# Altium PCB mppt.PcbDoc (part 6 of 6)
Units mm, origin at the board's own origin, x right, y up, seen from the top; angles counter-clockwise.
Board outline 161 x 166 mm, 6 copper layers (Top Layer, Layer 1, Layer 2, Layer 3, Layer 4, Bottom Layer), stack 0.815 mm thick; 460 components, 230 nets, 1421 pads, 2551 vias.
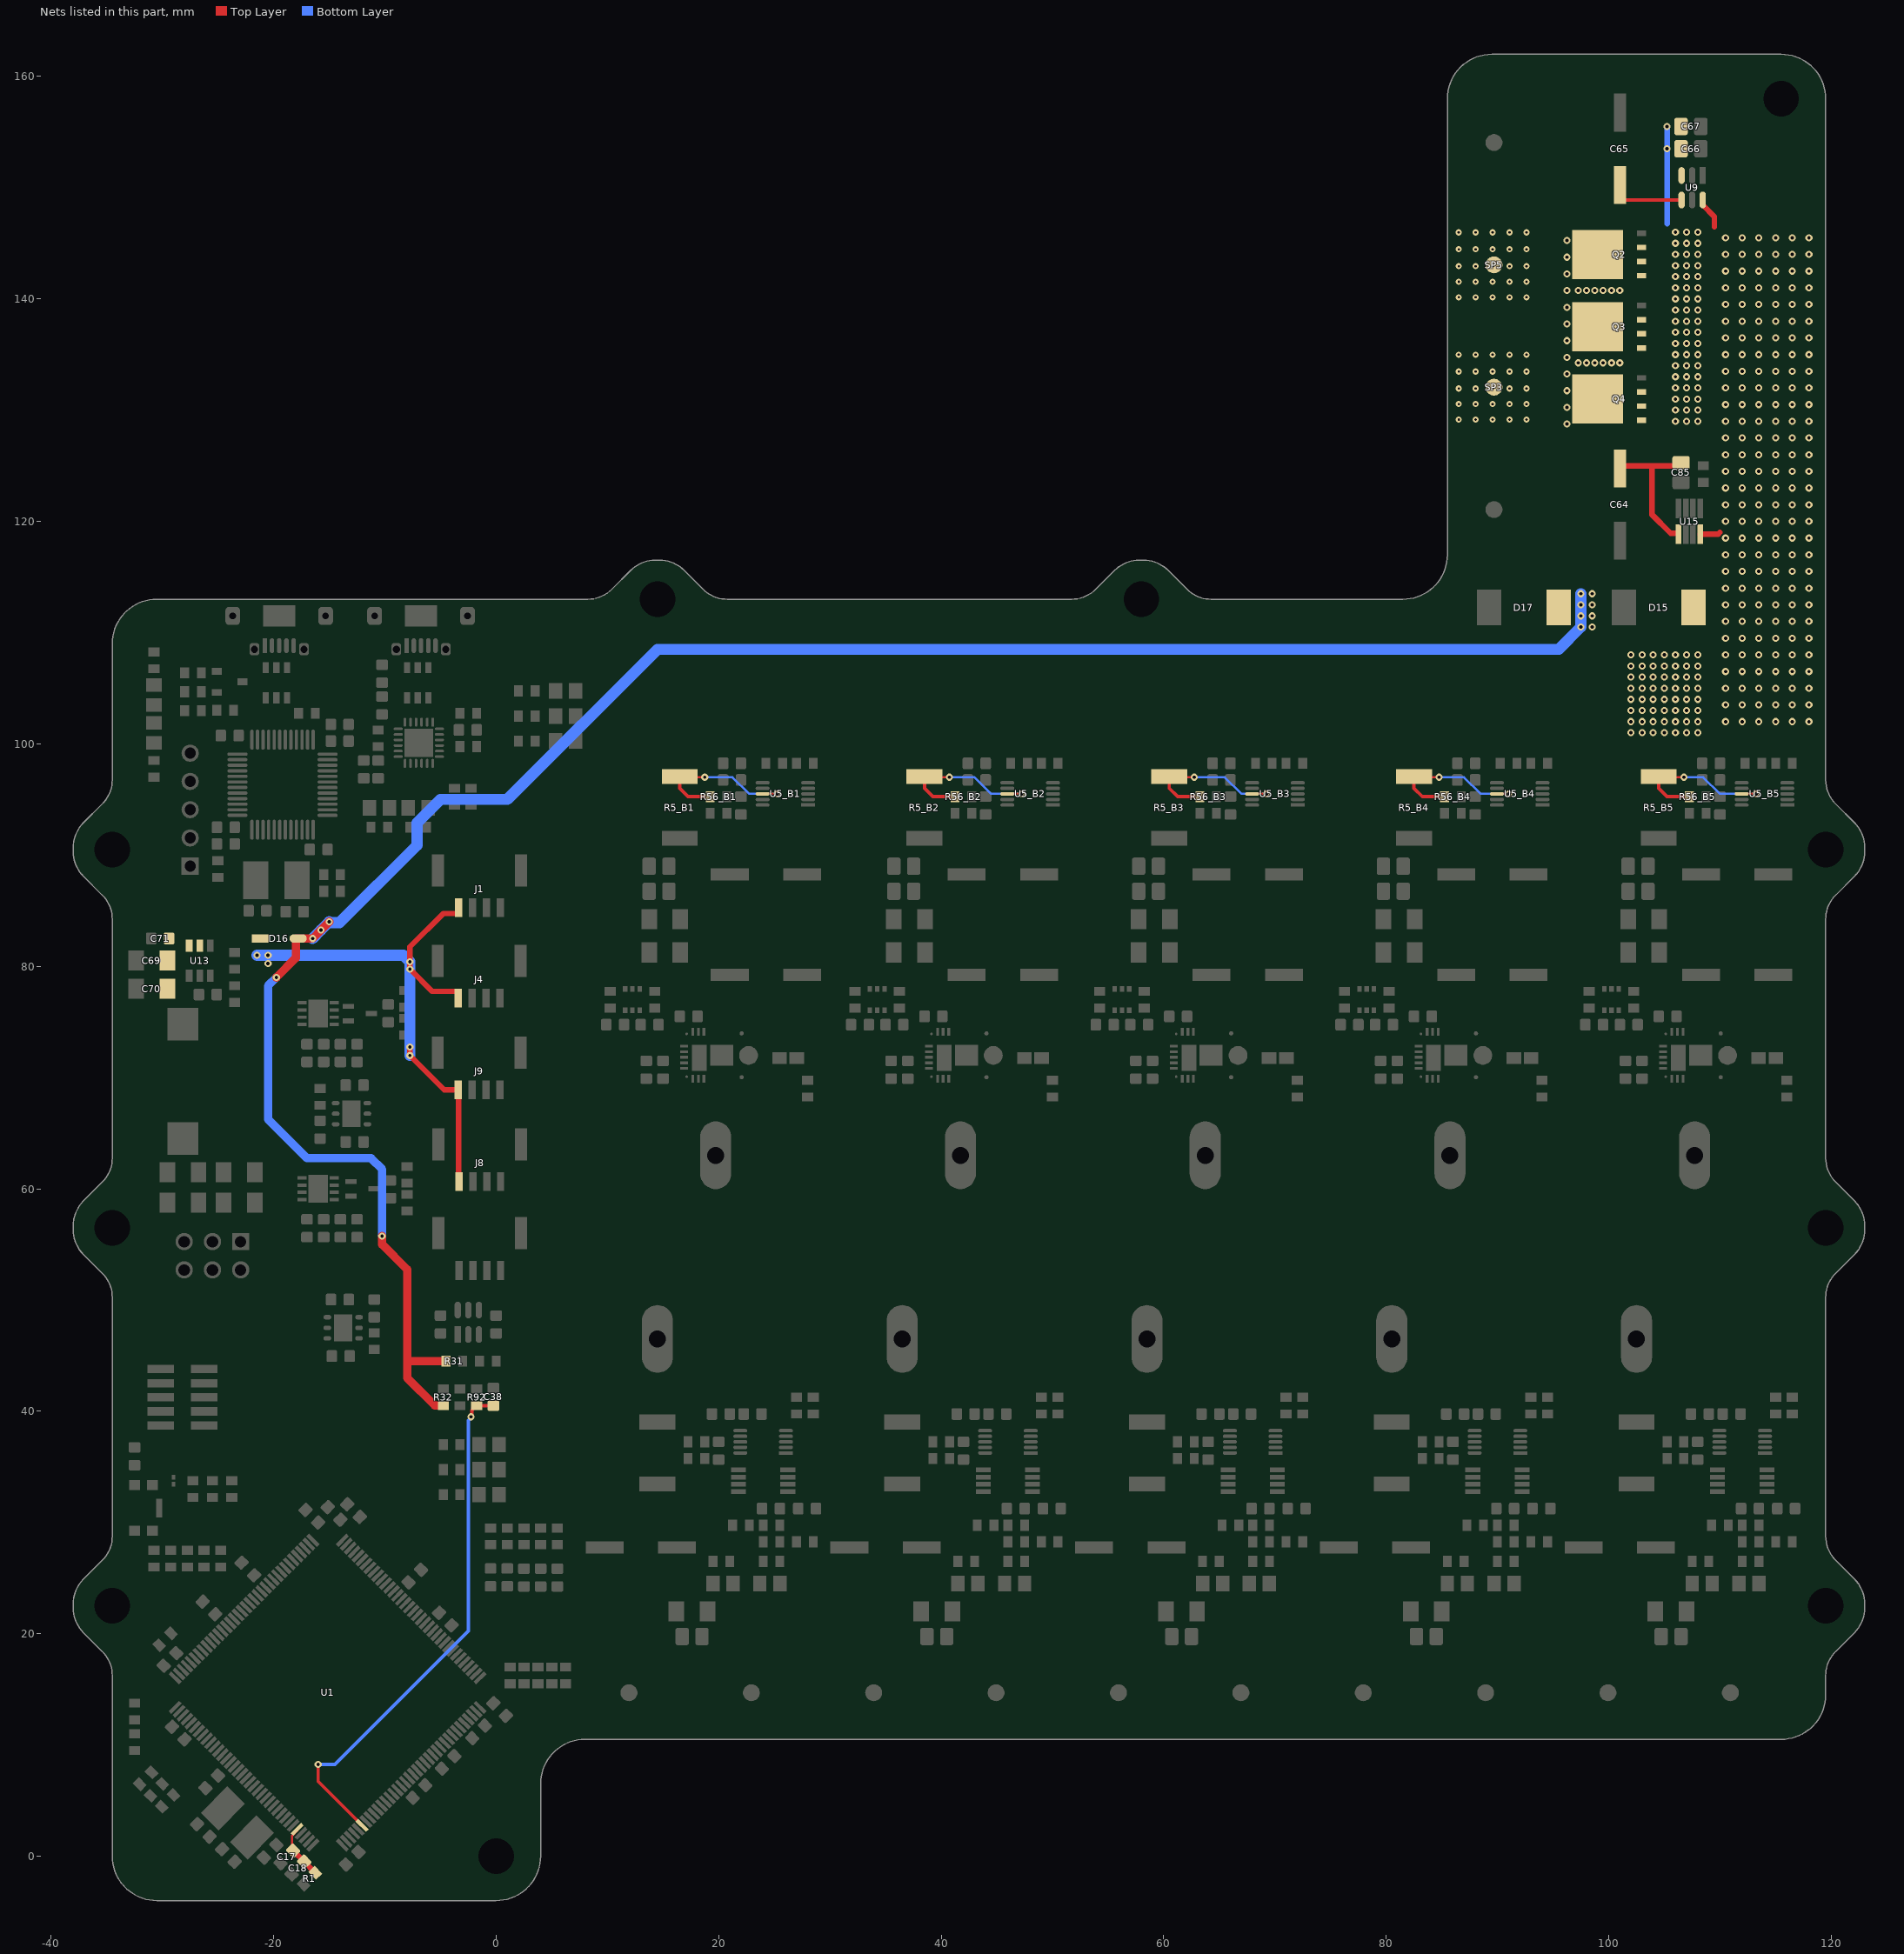
[diagram p9: the nets of this part, all layers, seen from the top]

## Via types
v1: diameter 0.635, hole 0.305, Top Layer to Bottom Layer, tented both sides, 2197 vias
v2: diameter 0.559, hole 0.203, Top Layer to Bottom Layer, tented both sides, 350 vias
v3: diameter 0.5, hole 0.2, Top Layer to Bottom Layer, 4 vias

## Nets (pads, with @x,y where several pads share a name; then routed paths per layer and width w, separated by ;. In a path a pad name is that pad's centre, name@x,y a point inside that pad or via, vN(x,y) a via of type N, cw(c..) or ccw(c..) an arc to the next point about the centre after c; other vN are vias at no path point) (continued)
V_BAT: C64.2 C65.2 C85.2 D16.2 D17.1 Q2.5-6-7-8 Q3.5-6-7-8 Q4.5-6-7-8 R31.2 R32.2 SP3.SP SP5.SP U9.4 U15.5 | length 210.2
  Top Layer w0.3: C65.2@101,150.249 101,149.296 101.396,148.9 U9.4@106.55,148.9
  Top Layer w0.5: C64.2@101,124.751 101.249,125 103.874,125 ; U15.5@106.275,118.849 106.275,118.932 105.568,118.932 103.874,120.626 103.874,125 ; C85.2@106.5,125 103.874,125
  Top Layer w0.75: v1(-19.75,79) -18,80.75 -18,82.496 -17.996,82.5 v1(-16.5,82.5) v1(-15.75,83.25) v1(-15,84) ; v1(-10.25,55.75) -10.25,55 -8,52.75 -8,44.5 ; R32.2@-4.75,40.5 -4.775,40.525 -5.525,40.525 -8,43 -8,44.5 ; R31.2@-4.5,44.5 -8,44.5
  Bottom Layer w0.75: v1(-19.75,79) -20.5,78.25 -20.5,66.25 -17,62.75 -11.25,62.75 -10.25,61.75 v1(-10.25,55.75)
  Bottom Layer w1: v1(-16.5,82.5) v1(-15.75,83.25) v1(-15,84) -14.914,83.914 -14.086,83.914 -7.105,90.895 -7.105,92.895 -5,95 1,95 14.5,108.5 95.5,108.5 v1(97.5,110.5) v1(97.5,111.5) v1(97.5,112.5) v1(97.5,113.5)
  other v1: 98.5,110.5 98.5,111.5 98.5,112.5 98.5,113.5 96.25,128.75 96.25,130.25 96.25,131.75 96.25,133.25 97.25,134.25 98,134.25 98.75,134.25 99.5,134.25 100.25,134.25 101,134.25 96.25,134.75 96.25,136.25 96.25,137.75 96.25,139.25 96.25,140.75 97.25,140.75 98,140.75 98.75,140.75 99.5,140.75 100.25,140.75 101,140.75 96.25,142.25 96.25,143.75 96.25,145.25
  other v2: 86.518,129.151 88.042,129.151 89.566,129.151 91.09,129.151 92.614,129.151 86.518,130.548 88.042,130.548 89.566,130.548 91.09,130.548 92.614,130.548 86.518,131.945 88.042,131.945 89.566,131.945 91.09,131.945 92.614,131.945 86.518,133.469 88.042,133.469 89.566,133.469 91.09,133.469 92.614,133.469 86.516,134.984 88.04,134.984 89.564,134.984 91.088,134.984 92.612,134.984 86.518,140.151 88.042,140.151 89.566,140.151 91.09,140.151 92.614,140.151 86.518,141.548 88.042,141.548 89.566,141.548 91.09,141.548 92.614,141.548 86.518,142.945 88.042,142.945 89.566,142.945 91.09,142.945 92.614,142.945 86.518,144.469 88.042,144.469 89.566,144.469 91.09,144.469 92.614,144.469 86.516,145.984 88.04,145.984 89.564,145.984 91.088,145.984 92.612,145.984
V_BUS: C69.1 C70.1 C71.1 D16.1 J1.1 J4.1 J8.1 J9.1 U13.2 U13.3 | length 50.9
  Top Layer w0.5: v1(-7.75,72.75) v1(-7.75,71.986) -4.664,68.9 J9.1@-3.4,68.9 -3.375,68.875 -3.375,60.675 J8.1@-3.35,60.65 ; J4.1@-3.4,77.15 -3.4,77.671 -3.48,77.751 -5.751,77.751 v1(-7.75,79.75) v1(-7.75,80.414) -7.75,81.75 -4.75,84.75 -3.455,84.75 -3.375,84.83 J1.1@-3.375,85.273
  Bottom Layer w1: v1(-21.5,81) v1(-20.5,81) -8.336,81 v1(-7.75,80.414) v1(-7.75,79.75) v1(-7.75,72.75) v1(-7.75,71.986)
  other v1: -20.5,80.25
V_BUS_DIV: C38.2 R92.2 U1.42 | length 47.7
  Top Layer w0.3: v1(-16,8.25) -16,6.711 U1.42@-12.039,2.75 ; v1(-2.25,39.5) -2.186,39.564 -2.186,40.064 -2.1,40.15 -2.1,40.25 -1.85,40.5 C38.2@-0.25,40.5
  Bottom Layer w0.3: v1(-16,8.25) -14.5,8.25 -2.5,20.25 -2.5,39.159 -2.25,39.409 v1(-2.25,39.5)
V_PV: C66.2 C67.2 D15.1 Q2.1 Q2.2 Q2.3 Q3.1 Q3.2 Q3.3 Q4.1 Q4.2 Q4.3 R5_B1.2 R5_B2.2 R5_B3.2 R5_B4.2 R5_B5.2 R56_B1.2 R56_B2.2 R56_B3.2 R56_B4.2 R56_B5.2 U5_B1.8 U5_B2.8 U5_B3.8 U5_B4.8 U5_B5.8 U9.3 U9.6 U15.8 | length 87.1
  Top Layer w0.203: R5_B1.2@16.5,97.063 16.563,97 v1(18.75,97) ; U5_B1.8@23.949,95.5 v1(25.25,95.5) ; R5_B2.2@38.5,97.063 38.563,97 v1(40.75,97) ; U5_B2.8@45.949,95.5 v1(47.25,95.5) ; R5_B3.2@60.5,97.063 60.563,97 v1(62.75,97) ; U5_B3.8@67.949,95.5 v1(69.25,95.5) ; R5_B4.2@82.5,97.063 82.563,97 v1(84.75,97) ; U5_B4.8@89.949,95.5 v1(91,95.5) ; R5_B5.2@104.5,97.063 104.563,97 v1(106.75,97) ; U5_B5.8@111.949,95.5 v1(113.25,95.5)
  Top Layer w0.3: R5_B1.2@16.5,97.063 16.5,96 17.25,95.25 R56_B1.2@19.25,95.25 ; R5_B2.2@38.5,97.063 38.5,96 39.25,95.25 R56_B2.2@41.25,95.25 ; R5_B3.2@60.5,97.063 60.5,96 61.25,95.25 R56_B3.2@63.25,95.25 ; R5_B4.2@82.5,97.063 82.5,96 83.25,95.25 R56_B4.2@85.25,95.25 ; R5_B5.2@104.5,97.063 104.5,96 105.25,95.25 R56_B5.2@107.25,95.25 ; C66.2@106.5,153.5 C66.2@106.525,153.475
  Top Layer w0.5: U15.8@108.225,118.849 109.849,118.849 110,119 ; U9.6@108.45,148.9 108.45,148.432 109.5,147.382 109.5,146.5
  Bottom Layer w0.203: v1(18.75,97) 21.25,97 22.75,95.5 v1(25.25,95.5) ; v1(40.75,97) 43,97 44.5,95.5 v1(47.25,95.5) ; v1(62.75,97) 65.5,97 67,95.5 v1(69.25,95.5) ; v1(84.75,97) 87,97 88.5,95.5 v1(91,95.5) ; v1(106.75,97) 108.5,97 110,95.5 v1(113.25,95.5)
  Bottom Layer w0.5: 105.25,146.75 v1(105.25,153.5) v1(105.25,155.5)
  other v1: 102,101 103,101 104,101 105,101 106,101 107,101 108,101 102,102 103,102 104,102 105,102 106,102 107,102 108,102 110.5,102 112,102 113.5,102 115,102 116.5,102 118,102 102,103 103,103 104,103 105,103 106,103 107,103 108,103 110.5,103.5 112,103.5 113.5,103.5 115,103.5 116.5,103.5 118,103.5 102,104 103,104 104,104 105,104 106,104 107,104 108,104 102,105 103,105 104,105 105,105 106,105 107,105 108,105 110.5,105 112,105 113.5,105 115,105 116.5,105 118,105 102,106 103,106 104,106 105,106 106,106 107,106 108,106 110.5,106.5 112,106.5 113.5,106.5 115,106.5 116.5,106.5 118,106.5 102,107 103,107 104,107 105,107 106,107 107,107 108,107 102,108 103,108 104,108 105,108 106,108 107,108 108,108 110.5,108 112,108 113.5,108 115,108 116.5,108 118,108 110.5,109.5 112,109.5 113.5,109.5 115,109.5 116.5,109.5 118,109.5 110.5,111 112,111 113.5,111 115,111 116.5,111 118,111 110.5,112.5 112,112.5 113.5,112.5 115,112.5 116.5,112.5 118,112.5 110.5,114 112,114 113.5,114 115,114 116.5,114 118,114 110.5,115.5 112,115.5 113.5,115.5 115,115.5 116.5,115.5 118,115.5 110.5,117 112,117 113.5,117 115,117 116.5,117 118,117 110.5,118.5 112,118.5 113.5,118.5 115,118.5 116.5,118.5 118,118.5 110.5,120 112,120 113.5,120 115,120 116.5,120 118,120 110.5,121.5 112,121.5 113.5,121.5 115,121.5 116.5,121.5 118,121.5 110.5,123 112,123 113.5,123 115,123 116.5,123 118,123 110.5,124.5 112,124.5 113.5,124.5 115,124.5 116.5,124.5 118,124.5 110.5,126 112,126 113.5,126 115,126 116.5,126 118,126 110.5,127.5 112,127.5 113.5,127.5 115,127.5 116.5,127.5 118,127.5 106,129 107,129 108,129 110.5,129 112,129 113.5,129 115,129 116.5,129 118,129 106,130 107,130 108,130 110.5,130.5 112,130.5 113.5,130.5 115,130.5 116.5,130.5 118,130.5 106,131 107,131 108,131 106,132 107,132 108,132 110.5,132 112,132 113.5,132 115,132 116.5,132 118,132 106,133 107,133 108,133 110.5,133.5 112,133.5 113.5,133.5 115,133.5 116.5,133.5 118,133.5 106,134 107,134 108,134 106,135 107,135 108,135 110.5,135 112,135 113.5,135 115,135 116.5,135 118,135 106,136 107,136 108,136 110.5,136.5 112,136.5 113.5,136.5 115,136.5 116.5,136.5 118,136.5 106,137 107,137 108,137 106,138 107,138 108,138 110.5,138 112,138 113.5,138 115,138 116.5,138 118,138 106,139 107,139 108,139 110.5,139.5 112,139.5 113.5,139.5 115,139.5 116.5,139.5 118,139.5 106,140 107,140 108,140 106,141 107,141 108,141 110.5,141 112,141 113.5,141 115,141 116.5,141 118,141 106,142 107,142 108,142 110.5,142.5 112,142.5 113.5,142.5 115,142.5 116.5,142.5 118,142.5 106,143 107,143 108,143 106,144 107,144 108,144 110.5,144 112,144 113.5,144 115,144 116.5,144 118,144 106,145 107,145 108,145 110.5,145.5 112,145.5 113.5,145.5 115,145.5 116.5,145.5 118,145.5 106,146 107,146 108,146
VREF_P: C17.2 C18.2 R1.2 U1.32 | length 5
  Top Layer w0.203: C17.2@-18.25,0.5 -18.25,0.989 -18.341,1.081 -18.341,1.855 -17.89,2.306 U1.32@-17.89,2.414
  Top Layer w0.5: C17.2@-18.25,0.5 C18.2@-17.25,-0.5 R1.2@-16.25,-1.5
pads on no net: CR1.5 CR2.5 D5_B1.2 D5_B1.5 D5_B2.2 D5_B2.5 D5_B3.2 D5_B3.5 D5_B4.2 D5_B4.5 D5_B5.2 D5_B5.5 H1.6 H2.6 H3.6 H4.6 H5.6 H7.6 H8.6 H9.6 H10.6 H11.6 J1.5 J1.6 J4.5 J4.6 J5.5 J5.6 J8.5 J8.6 J9.5 J9.6 P2.7 S1.3 S1.4 S1.5 U1.1 U1.2 U1.3 U1.4 U1.5 U1.7 U1.8 U1.9 U1.14 U1.18 U1.20 U1.22 U1.26 U1.27 U1.28 U1.29 U1.34 U1.35 U1.36 U1.37 U1.54 U1.55 U1.56 U1.57 U1.58 U1.59 U1.60 U1.63 U1.64 U1.65 U1.66 U1.67 U1.68 U1.69 U1.70 U1.75 U1.76 U1.77 U1.81 U1.82 U1.85 U1.86 U1.87 U1.88 U1.89 U1.90 U1.93 U1.99 U1.117 U1.122 U1.123 U1.124 U1.126 U1.127 U1.128 U1.129 U1.132 U1.139 U1.140 U1.141 U1.142 U2.2 U2.3 U2.4 U2.11 U2.12 U2.13 U2.14 U2.16 U2.17 U2.19 U2.20 U2.21 U2.22 U2.28 U2.29 U2.39 U2.40 U2.41 U2.42 U2.43 U2.45 U2.46 U7_B1.1 U7_B1.2 U7_B1.3 U7_B1.4 U7_B1.8 U7_B1.9 U7_B1.16 U7_B2.1 U7_B2.2 U7_B2.3 U7_B2.4 U7_B2.8 U7_B2.9 U7_B2.16 U7_B3.1 U7_B3.2 U7_B3.3 U7_B3.4 U7_B3.8 U7_B3.9 U7_B3.16 U7_B4.1 U7_B4.2 U7_B4.3 U7_B4.4 U7_B4.8 U7_B4.9 U7_B4.16 U7_B5.1 U7_B5.2 U7_B5.3 U7_B5.4 U7_B5.8 U7_B5.9 U7_B5.16 U8.3 U12.3 U14.1 U14.10 U14.11 U14.12 U14.15 U14.16 U14.17 U14.18 U14.19 U14.22 U14.23 U14.24 U15.3

## Polygon pours and split planes (outlines as drawn)
GND on Top Layer "NONET_L04_P-001" (solid, remove dead copper, pour order 148): -34,0 ccw(c-30.5,0) -30.5,-3.5 0,-3.5 ccw(c0,0) 3.5,0 3.5,6.5 cw(c8,6.5) 8,11 115.5,11 ccw(c115.5,14.5) 119,14.5 119,158.96 ccw(c116.46,158.96) 116.46,161.5 89.5,161.5 ccw(c89.5,158) 86,158 86,117 cw(c81.5,117) 81.5,112.5 -30.5,112.5 ccw(c-30.5,109) -34,109
NetL1_B1_1 on Top Layer "NONET_L04_P-001" (solid, pour order 93): 19.5,70.5 19.5,67.5 17.5,65.5 17.5,59.5 22,59.5 24,61.5 24,70.5
NetL1_B2_1 on Top Layer "NONET_L04_P-001" (solid, pour order 95): 41.5,70.5 41.5,67.5 39.5,65.5 39.5,59.5 44,59.5 46,61.5 46,70.5
NetL1_B3_1 on Top Layer "NONET_L04_P-001" (solid, pour order 94): 63.5,70.5 63.5,67.5 61.5,65.5 61.5,59.5 66,59.5 68,61.5 68,70.5
NetL1_B4_1 on Top Layer "NONET_L04_P-001" (solid, pour order 92): 85.5,70.5 85.5,67.5 83.5,65.5 83.5,59.5 88,59.5 90,61.5 90,70.5
NetL1_B5_1 on Top Layer "NONET_L04_P-001" (solid, pour order 91): 107.5,70.5 107.5,67.5 105.5,65.5 105.5,59.5 110,59.5 112,61.5 112,70.5
V_PV on Top Layer "Top Layer-V_PV" (solid, pour order 146): 14.75,97.5 18.25,97.5 18.25,97.96 cw(c20.79,97.96) 20.79,100.5 34.21,100.5 cw(c34.21,97.96) 36.75,97.96 36.75,97.5 40.25,97.5 40.25,97.96 cw(c42.79,97.96) 42.79,100.5 56.21,100.5 cw(c56.21,97.96) 58.75,97.96 58.75,97.5 62.25,97.5 62.25,97.96 cw(c64.79,97.96) 64.79,100.5 78.21,100.5 cw(c78.21,97.96) 80.75,97.96 80.75,97.5 84.25,97.5 84.25,97.96 cw(c86.79,97.96) 86.79,100.5 100.21,100.5 cw(c100.21,97.96) 102.75,97.96 102.75,97.5 106.25,97.5 106.25,97.96 cw(c108.79,97.96) 108.79,100.5 116.46,100.5 ccw(c116.46,103.04) 119,103.04 119,147 102,147 102,128.5 106.96,128.5 cw(c106.96,125.96) 109.5,125.96 109.5,114 106.5,114 106.5,110.5 109.277,110.5 cw(c106.96,111.54) 106.96,109 17.29,109 ccw(c17.29,106.46) 14.75,106.46
3V3_INA on Top Layer "NONET_L04_P-001" (solid, pour order 120): 21.5,98.75 21.5,96.25 24.5,96.25 24.75,96.5 24.75,97.5 23.5,98.75
3V3 on Top Layer "NONET_L04_P-001" (solid, pour order 106): -17,29.75 -15,27.75 -14.25,27.75 -12.5,29.5 -13.5,30.5 -16.25,30.5
3V3 on Top Layer "NONET_L04_P-001" (solid, pour order 145): -15,59.25 -15,58.5 -14.5,58 -14.5,56.75 -11.75,56.75 -11.75,58.5 -13.25,58.5 -14,59.25
3V3 on Top Layer "NONET_L04_P-001" (solid, pour order 139): -15,75 -15,74.25 -14.5,73.75 -14.5,72.5 -11.75,72.5 -11.75,74.25 -13.25,74.25 -14,75
3V3_INA on Top Layer "NONET_L04_P-001" (solid, pour order 77): 86.25,38.25 88.75,38.25 88.75,40.5 86.25,40.5
3V3_INA on Top Layer "NONET_L04_P-001" (solid, pour order 122): 43.5,98.75 43.5,96.25 46.5,96.25 46.75,96.5 46.75,97.5 45.5,98.75
V_BUS on Top Layer "NONET_L04_P-001" (solid, pour order 137): -20,82.5 -21,83.5 -30.25,83.5 -30.25,77 -28.75,77 -28.75,80 -27.75,81 -26.25,81 -26.25,82.5 -22.992,82.5 -21.188,79.75 -20,79.75
V_BAT on Top Layer "NONET_L04_P-001" (solid, pour order 133): 95,114 95.023,114.023 98.977,114.023 99,114 99,110 94.108,110 94.108,114.011
5V on Top Layer "NONET_L04_P-001" (solid, pour order 128): -12.5,70.5 -12.5,67.75 -12,67.25 -9.25,67.25 -9.25,70.5
3V3_INA on Top Layer "NONET_L04_P-001" (solid, pour order 80): 42.25,38.25 44.75,38.25 44.75,40.5 42.25,40.5
3V3_INA on Top Layer "NONET_L04_P-001" (solid, pour order 70): 47,30.75 49.5,30.75 49.5,32.25 49.5,32.775 47,32.775
3V3_INA on Top Layer "NONET_L04_P-001" (solid, pour order 67): 91,30.75 93.5,30.75 93.5,32.25 93.5,32.775 91,32.775
5V_USB on Top Layer "NONET_L04_P-001" (solid, pour order 127): -12.543,100.264 -12.543,98.014 -9.793,98.014 -9.793,100.264
3V3 on Top Layer "NONET_L04_P-001" (solid, pour order 126): -24.25,93.75 -24.25,90 -21.25,90 -21.25,93.75
3V3_INA on Top Layer "NONET_L04_P-001" (solid, pour order 66): 112.75,30.75 115.75,30.75 115.75,32.775 112.75,32.775
3V3_INA on Top Layer "NONET_L04_P-001" (solid, pour order 125): 109.5,98.75 109.5,96.25 112.5,96.25 112.75,96.5 112.75,97.5 111.5,98.75
3V3_INA on Top Layer "NONET_L04_P-001" (solid, pour order 124): 87.5,98.75 87.5,96.25 90.5,96.25 90.75,96.5 90.75,98.75
3V3_INA on Top Layer "NONET_L04_P-001" (solid, pour order 123): 65.5,98.75 65.5,96.25 68.5,96.25 68.75,96.5 68.75,98.75
3V3_INA on Top Layer "NONET_L04_P-001" (solid, pour order 116): -12.5,67.25 -8.75,67.25 -8.75,63.5 -12.5,63.5
5V_USB on Top Layer "NONET_L04_P-001" (solid, pour order 115): -11.5,110.25 -8.5,110.25 -7.75,109.5 -7.75,109 -11.5,109
5V_STLINK on Top Layer "NONET_L04_P-001" (solid, pour order 114): -24.25,110.25 -21,110.25 -20.5,109.75 -20.5,109 -24.25,109
V_PV on Top Layer "NONET_L04_P-001" (solid, pour order 112): 104.75,156.25 107,156.25 107,150.5 106.75,150.25 104.75,150.25
5V_REG on Top Layer "NONET_L04_P-001" (solid, pour order 111): -29.75,66 -29.75,63 -29.25,63 -27.5,61.25 -27.5,57.5 -29,56 -29,54.25 -27,54.25 -27,54.75 -23.75,58 -23.75,62.5 -24.5,63.25 -25.75,63.25 -26.75,64.25 -26.75,66
5V on Top Layer "NONET_L04_P-001" (solid, pour order 110): -17.75,46.5 -16,46.5 -15.5,47 -14.75,47 -14.75,46 -14.25,45.5 -14.25,44 -17.75,44
NetC68_2 on Top Layer "NONET_L04_P-001" (solid, pour order 109): -27,79.75 -27,79 -29.75,76.25 -29.75,73.25 -26.5,73.25 -26.5,76 -26.25,76.25 -26.25,79.75
3V3 on Top Layer "NONET_L04_P-001" (solid, pour order 105): -31.5,17.75 -31.5,13.75 -30,13.75 -28,15.75 -30,17.75
3V3 on Top Layer "NONET_L04_P-001" (solid, pour order 104): -17.75,51.25 -17.75,46.75 -16.25,46.75 -15.75,47.25 -14.75,47.25 -14.75,51.25
PV_OUT_B2 on Top Layer "NONET_L04_P-001" (solid, pour order 100): 41.5,73.5 45.75,73.5 45.75,89.25 43,92 36.75,92 36.75,91 36.75,85.75 37.25,85.25 37.25,80.25 41.5,76
NetL1_B2_2 on Top Layer "NONET_L04_P-001" (solid, pour order 85): 34.75,38.5 38.25,38.5 38.25,39.5 39.25,40.5 39.25,50.5 33.75,50.5 33.75,40.5 34.75,39.5
PV_IN_B2 on Top Layer "NONET_L04_P-001" (solid, pour order 75): 30,10.5 38.001,10.5 38.001,18.501 39,19.5 39,23 34.75,27.25 34.75,28.5 38.5,32.25 38.5,34.25 34.75,34.25 30,29.5
NetR83_B2_1 on Top Layer "NONET_L04_P-001" (solid, pour order 65): 47,30.25 49.25,30.25 49.25,27.75 47,27.75
PV_OUT_B3 on Top Layer "NONET_L04_P-001" (solid, pour order 99): 63.5,73.5 67.75,73.5 67.75,89.25 65,92 58.75,92 58.75,91 58.75,85.75 59.25,85.25 59.25,80.25 63.5,76
NetL1_B3_2 on Top Layer "NONET_L04_P-001" (solid, pour order 84): 56.75,38.5 60.25,38.5 60.25,39.5 61.25,40.5 61.25,50.5 55.75,50.5 55.75,40.5 56.75,39.5
3V3_INA on Top Layer "NONET_L04_P-001" (solid, pour order 79): 64.25,38.25 66.75,38.25 66.75,40.5 64.25,40.5
PV_IN_B3 on Top Layer "NONET_L04_P-001" (solid, pour order 74): 52,10.5 60.001,10.5 60.001,18.501 61,19.5 61,23 56.75,27.25 56.75,28.5 60.5,32.25 60.5,34.25 56.75,34.25 52,29.5
3V3_INA on Top Layer "NONET_L04_P-001" (solid, pour order 69): 69,30.75 71.5,30.75 71.5,32.25 71.5,32.775 69,32.775
NetR83_B3_1 on Top Layer "NONET_L04_P-001" (solid, pour order 64): 69,30.25 71.25,30.25 71.25,27.75 69,27.75
PV_OUT_B1 on Top Layer "NONET_L04_P-001" (solid, pour order 98): 19.5,73.5 23.75,73.5 23.75,89.25 21,92 14.75,92 14.75,91 14.75,85.75 15.25,85.25 15.25,80.25 19.5,76
NetL1_B1_2 on Top Layer "NONET_L04_P-001" (solid, pour order 83): 12.75,38.5 16.25,38.5 16.25,39.5 17.25,40.5 17.25,50.5 11.75,50.5 11.75,40.5 12.75,39.5
3V3_INA on Top Layer "NONET_L04_P-001" (solid, pour order 78): 20.25,38.25 22.75,38.25 22.75,40.5 20.25,40.5
PV_IN_B1 on Top Layer "NONET_L04_P-001" (solid, pour order 73): 8,10.5 16.001,10.5 16.001,18.501 17,19.5 17,23 12.75,27.25 12.75,28.5 16.5,32.25 16.5,34.25 12.75,34.25 8,29.5
3V3_INA on Top Layer "NONET_L04_P-001" (solid, pour order 68): 25,30.75 27.5,30.75 27.5,32.25 27.5,32.775 25,32.775
NetR83_B1_1 on Top Layer "NONET_L04_P-001" (solid, pour order 63): 25,30.25 27.25,30.25 27.25,27.75 25,27.75
PV_OUT_B4 on Top Layer "NONET_L04_P-001" (solid, pour order 97): 85.5,73.5 89.75,73.5 89.75,89.25 87,92 80.75,92 80.75,91 80.75,85.75 81.25,85.25 81.25,80.25 85.5,76
NetL1_B4_2 on Top Layer "NONET_L04_P-001" (solid, pour order 82): 78.75,38.5 82.25,38.5 82.25,39.5 83.25,40.5 83.25,50.5 77.75,50.5 77.75,40.5 78.75,39.5
PV_IN_B4 on Top Layer "NONET_L04_P-001" (solid, pour order 72): 74,10.5 82.001,10.5 82.001,18.501 83,19.5 83,23 78.75,27.25 78.75,28.5 82.5,32.25 82.5,34.25 78.75,34.25 74,29.5
NetR83_B4_1 on Top Layer "NONET_L04_P-001" (solid, pour order 62): 91,30.25 93.25,30.25 93.25,27.75 91,27.75
NetR83_B5_1 on Top Layer "NONET_L04_P-001" (solid, pour order 61): 113,30.25 115.25,30.25 115.25,27.75 113,27.75
PV_IN_B5 on Top Layer "NONET_L04_P-001" (solid, pour order 71): 96,10.5 104.001,10.5 104.001,18.501 105,19.5 105,23 100.75,27.25 100.75,28.5 104.5,32.25 104.5,34.25 100.75,34.25 96,29.5
3V3_INA on Top Layer "NONET_L04_P-001" (solid, pour order 76): 108.25,38.25 110.75,38.25 110.75,40.5 108.25,40.5
NetL1_B5_2 on Top Layer "NONET_L04_P-001" (solid, pour order 81): 100.75,38.5 104.25,38.5 104.25,39.5 105.25,40.5 105.25,50.5 99.75,50.5 99.75,40.5 100.75,39.5
PV_OUT_B5 on Top Layer "NONET_L04_P-001" (solid, pour order 96): 107.5,73.5 111.75,73.5 111.75,89.25 109,92 102.75,92 102.75,91 102.75,85.75 103.25,85.25 103.25,80.25 107.5,76
3V3 on Top Layer "NONET_L04_P-001" (solid, pour order 58): -23.25,100.5 -22.25,99.5 -22,99.5 -21.75,99.75 -21.75,102.5 -22.25,102.5 -23.25,101.5
3V3 on Top Layer "NONET_L04_P-001" (solid, pour order 57): -16,99.075 -14.25,99.075 -14.25,103.5 -15.25,103.5 -15.25,101.75 -16,101
V_BAT on Top Layer "NONET_L04_P-001" (solid, pour order 55): 100.5,123 101.5,123 101.5,152 100.5,152 100.5,149.54 cw(c97.96,149.54) 97.96,147 85.5,147 85.5,138.999 92.001,138.999 cw(c92.001,137.5) 93.5,137.5 cw(c92,137.5) 92,136 85.5,136 85.5,127.999 97.96,127.999 cw(c97.96,125.459) 100.5,125.459
GND on Bottom Layer "NONET_L04_P-001" (solid, remove dead copper, pour order 154): -34,0 ccw(c-30.5,0) -30.5,-3.5 0,-3.5 ccw(c0,0) 3.5,0 3.5,6.5 cw(c8,6.5) 8,11 115.5,11 ccw(c115.5,14.5) 119,14.5 119,158.96 ccw(c116.46,158.96) 116.46,161.5 89.5,161.5 ccw(c89.5,158) 86,158 86,117 cw(c81.5,117) 81.5,112.5 -30.5,112.5 ccw(c-30.5,109) -34,109
V_BAT on Bottom Layer "NONET_L04_P-001" (solid, pour order 56): 86,147 101.5,147 101.5,128 86.25,128 86.25,136 92,136 ccw(c92,137.5) 93.5,137.5 ccw(c92,137.5) 92,139 86,139
V_PV on Bottom Layer "NONET_L04_P-001" (solid, pour order 102): 101.25,100.5 116.46,100.5 ccw(c116.46,103.04) 119,103.04 119,147 102.057,147 102.057,128.557 cw(c102,128.557) 102,128.5 106.96,128.5 cw(c106.96,125.96) 109.5,125.96 109.5,111.54 cw(c106.96,111.54) 106.96,109 101.25,109
5V on Bottom Layer "Bottom Layer-5V" (solid, pour order 153): -8.5,51.5 0,60 0,82 7.5,89.5 7.5,93.5 -2,93.5 -2,70.5 -17.25,70.5 -17.25,75.75 -18.75,75.75 -18.75,67.75 -2,67.75 -2,62 -10,54 -17,54 -17,60 -18.75,60 -19,59.75 -19,54 -29.5,54 -29.5,51.5 -12,51.5 -12,46.5 -17.75,46.5 -17.75,44 -10.25,44 -10.25,51.5
V_BUS on Bottom Layer "NONET_L04_P-001" (solid, pour order 140): -22,81.75 -20,81.75 -20,79.75 -22,79.75
GND on Layer 3 "NONET_L04_P-001" (solid, remove dead copper, pour order 150): -34,0 ccw(c-30.5,0) -30.5,-3.5 0,-3.5 ccw(c0,0) 3.5,0 3.5,6.5 cw(c8,6.5) 8,11 115.5,11 ccw(c115.5,14.5) 119,14.5 119,158.96 ccw(c116.46,158.96) 116.46,161.5 89.5,161.5 ccw(c89.5,158) 86,158 86,117 cw(c81.5,117) 81.5,112.5 -30.5,112.5 ccw(c-30.5,109) -34,109
3V3 on Layer 3 "NONET_L04_P-001" (solid, remove dead copper, pour order 118): -34,0 ccw(c-30.5,0) -30.5,-3.5 0,-3.5 ccw(c0,0) 3.5,0 3.5,112.5 -30.5,112.5 ccw(c-30.5,109) -34,109 -34,106
3V3_INA on Layer 3 "NONET_L04_P-001" (solid, pour order 103): -11,67.25 2,67.25 2,103.5 119,103.5 119,93.75 98.75,93.75 6,93.75 6,40.5 119,40.5 119,24.25 3,24.25 3,63.5 -11,63.5
V_BAT on Layer 3 "NONET_L04_P-001" (solid, pour order 136): 86,136 96,136 99,133 99,109.5 96,109.5 96,124.5 92.5,128 86,128
5V on Layer 3 "NONET_L04_P-001" (solid, pour order 121): 5.5,93.5 5.5,89.5 96.75,89.5 96.75,93.5
GND on Layer 2 "NONET_L04_P-001" (solid, remove dead copper, pour order 149): -34,0 ccw(c-30.5,0) -30.5,-3.5 0,-3.5 ccw(c0,0) 3.5,0 3.5,6.5 cw(c8,6.5) 8,11 115.5,11 ccw(c115.5,14.5) 119,14.5 119,158.96 ccw(c116.46,158.96) 116.46,161.5 89.5,161.5 ccw(c89.5,158) 86,158 86,117 cw(c81.5,117) 81.5,112.5 -30.5,112.5 ccw(c-30.5,109) -34,109
GND on Layer 1 "NONET_L04_P-001" (solid, remove dead copper, pour order 151): -34,0 ccw(c-30.5,0) -30.5,-3.5 0,-3.5 ccw(c0,0) 3.5,0 3.5,6.5 cw(c8,6.5) 8,11 115.5,11 ccw(c115.5,14.5) 119,14.5 119,158.96 ccw(c116.46,158.96) 116.46,161.5 89.5,161.5 ccw(c89.5,158) 86,158 86,117 cw(c81.5,117) 81.5,112.5 -30.5,112.5 ccw(c-30.5,109) -34,109
GND on Layer 4 "NONET_L04_P-001" (solid, remove dead copper, pour order 113): -34,0 ccw(c-30.5,0) -30.5,-3.5 0,-3.5 ccw(c0,0) 3.5,0 3.5,6.5 cw(c8,6.5) 8,11 115.5,11 ccw(c115.5,14.5) 119,14.5 119,158.96 ccw(c116.46,158.96) 116.46,161.5 89.5,161.5 ccw(c89.5,158) 86,158 86,117 cw(c81.5,117) 81.5,112.5 -30.5,112.5 ccw(c-30.5,109) -34,109

## Keep-outs
Keep-Out Layer:
  circle w0.3: c-34.5,56.5 r3.5
  circle w0.3: c14.5,113 r3.5
  circle w0.3: c58,113 r3.5
  circle w0.3: c119.5,56.5 r3
  circle w0.3: c119.5,90.5 r3
  circle w0.3: c119.5,22.5 r3
  circle w0.3: c-34.5,90.5 r3.5
  circle w0.3: c-34.5,22.5 r3.5
  circle w0.3: c115.5,158 r3.5
  circle w0.3: c0,0 r3.5
  region: -31.5,66.25 -24.75,66.25 -23.75,67.75 -23.75,71.5 -24.75,73 -31.5,73 -32.5,71.5 -32.5,67.75

## Silkscreen, mask and mechanical layers (free items; w line width, h text height)
Top Overlay:
  region: 23.484,104.984 23.492,104.969 23.551,104.957 23.574,104.926 23.59,104.918 23.613,104.887 23.629,104.879 23.645,104.855 23.66,104.848 23.672,104.836 23.68,104.781 23.707,104.762 23.711,104.734 23.703,104.711 23.707,104.574 23.699,104.559 23.684,104.551 23.672,104.539 23.664,104.484 23.637,104.465 23.535,104.363 23.488,104.355 23.477,104.344 23.473,104.332 23.441,104.324 23.395,104.332 23.371,104.324 22.938,104.328 22.902,104.324 22.883,104.336 22.883,104.445 22.883,104.453 22.891,105 23.465,105.004
  region: 6 vertices and 22 holes, not listed, extent 20.781,102.004 52.281,111.902
  region: 28.652,104.73 28.664,104.719 28.672,104.703 28.695,104.687 28.703,104.633 28.73,104.613 28.738,104.559 28.766,104.547 28.77,104.52 28.766,104.5 28.793,104.473 28.805,104.469 28.809,104.434 28.805,104.383 28.824,104.363 28.84,104.355 28.852,104.297 28.879,104.277 28.887,104.223 28.902,104.215 28.922,104.195 28.93,104.148 28.941,104.137 28.953,104.133 28.961,104.102 28.953,104.07 28.961,104.039 28.988,104.02 28.992,104 28.98,103.988 28.324,103.996 28.32,104.016 28.328,104.023 28.332,104.027 28.359,104.047 28.367,104.102 28.391,104.117 28.398,104.148 28.391,104.172 28.398,104.203 28.418,104.223 28.43,104.227 28.437,104.281 28.449,104.293 28.465,104.301 28.473,104.395 28.508,104.422 28.512,104.473 28.539,104.484 28.555,104.547 28.566,104.559 28.578,104.562 28.586,104.594 28.578,104.625 28.586,104.656 28.598,104.668 28.613,104.676 28.621,104.738
  region: -7.125,34.5 -20.875,34.5 -20.875,42 -7.125,42
  lines w0.3: 7.5,11 7.5,98.5 ; 29.5,11 29.5,30.604 ; 29.5,31.896 29.5,78.351 ; 29.5,80.149 29.5,87.351 ; 29.5,89.149 29.5,98.75 ; 51.5,11 51.5,30.604 ; 51.5,31.896 51.5,98.75 ; 95.5,11 95.5,30.604 ; 95.5,31.896 95.5,98.75 ; 73.5,11 73.5,30.604 73.5,11 ; 73.5,31.896 73.5,98.75 73.5,31.896
  text "Angus Macdonald" at 87.5,159.255 h1.5
  text "GND" at 94.403,155.962 h2 r270
  text "V OUT" at 94.402,145.809 h2 r270
  text "V OUT" at 94.402,134.809 h2 r270
  text "GND" at 94.403,122.962 h2 r270
  text "STLK" at -30.259,110.152 h2
  text "USB" at -0.272,109.903 h2
  text "3V3" at 9.05,104.152 h2
  text "MISO GaN MPPT" at 54.9,102.962 h5
  text "3V3-I" at 9.05,101.902 h2
  text "5V" at 9.05,99.664 h2
  text "5" at 98.57,93.329 h4
  text "3" at 54.555,93.304 h4
  text "4" at 76.462,93.307 h4
  text "1" at 10.702,93.3 h4
  text "2" at 32.56,93.28 h4
  text "CAN1" at 3.903,89.894 h2 r270
  text "CAN1" at 3.903,81.394 h2 r270
  text "CAN2" at 3.903,73.432 h2 r270
  text "CAN2" at 3.903,65.432 h2 r270
  text "I2C" at 3.903,56.543 h2 r270
  text "5V SEL" at -28.581,49.403 h2
  text "JTAG" at -23.597,43.744 h2 r270
  text "ON" at 2.05,36.402 h2
  text "5" at 97.57,35.329 h4
  text "1" at 9.702,35.3 h4
  text "3" at 53.555,35.304 h4
  text "4" at 75.462,35.307 h4
  text "2" at 31.56,35.28 h4
  text "ERR" at 2.05,34.152 h2
  text "BAT" at 2.05,31.902 h2
  text "PV+" at 10.22,19.403 h2
  text "PV-" at 21.745,19.402 h2
  text "PV+" at 32.22,19.403 h2
  text "PV-" at 43.745,19.402 h2
  text "PV+" at 54.22,19.403 h2
  text "PV-" at 65.745,19.402 h2
  text "PV+" at 76.22,19.403 h2
  text "PV-" at 87.745,19.402 h2
  text "PV+" at 98.22,19.403 h2
  text "PV-" at 109.745,19.402 h2
Bottom Solder:
  region: 107,73.75 ccw(c107,72) 105.25,72 ccw(c107,72) 107,70.25 110.5,70.25 ccw(c110.5,72) 112.25,72 ccw(c110.5,72) 110.5,73.75
  region: 85,73.75 ccw(c85,72) 83.25,72 ccw(c85,72) 85,70.25 88.5,70.25 ccw(c88.5,72) 90.25,72 ccw(c88.5,72) 88.5,73.75
  region: 63,73.75 ccw(c63,72) 61.25,72 ccw(c63,72) 63,70.25 66.5,70.25 ccw(c66.5,72) 68.25,72 ccw(c66.5,72) 66.5,73.75
  region: 41,73.75 ccw(c41,72) 39.25,72 ccw(c41,72) 41,70.25 44.5,70.25 ccw(c44.5,72) 46.25,72 ccw(c44.5,72) 44.5,73.75
  region: 19,73.75 ccw(c19,72) 17.25,72 ccw(c19,72) 19,70.25 22.5,70.25 ccw(c22.5,72) 24.25,72 ccw(c22.5,72) 22.5,73.75
Outline:
  lines w0.254: 119.5,50.23 cw(c122.566,50.23) 120.398,52.398 122.102,54.102 ccw(c119.934,56.27) 123,56.27 123,56.5 123,56.73 ccw(c119.934,56.73) 122.102,58.898 120.398,60.602 cw(c122.566,62.77) 119.5,62.77 ; 119.5,50.25 119.5,28.77 ccw(c122.566,28.77) 120.398,26.602 122.102,24.898 cw(c119.934,22.73) 123,22.73 123,22.5 123,22.27 cw(c119.934,22.27) 122.102,20.102 120.398,18.398 ccw(c122.566,16.23) 119.5,16.23 119.5,14.5 cw(c115.5,14.5) 115.5,10.5 8,10.5 ccw(c8,6.5) 4,6.5 4,0 cw(c0,0) 0,-4 -30.5,-4 cw(c-30.5,0) -34.5,0 -34.5,15 -34.5,16.23 ccw(c-37.566,16.23) -35.398,18.398 -37.102,20.102 cw(c-34.934,22.27) -38,22.27 -38,22.5 -38,22.73 cw(c-34.934,22.73) -37.102,24.898 -35.398,26.602 ccw(c-37.566,28.77) -34.5,28.77 -34.5,30 -34.5,49 -34.5,50.23 ccw(c-37.566,50.23) -35.398,52.398 -37.102,54.102 cw(c-34.934,56.27) -38,56.27 -38,56.5 -38,56.73 cw(c-34.934,56.73) -37.102,58.898 -35.398,60.602 ccw(c-37.566,62.77) -34.5,62.77 -34.5,64 -34.5,83 -34.5,84.23 ccw(c-37.566,84.23) -35.398,86.398 -37.102,88.102 cw(c-34.934,90.27) -38,90.27 -38,90.5 -38,90.73 cw(c-34.934,90.73) -37.102,92.898 -35.398,94.602 ccw(c-37.566,96.77) -34.5,96.77 -34.5,98 ; 119.5,62.75 119.5,84.23 cw(c122.566,84.23) 120.398,86.398 122.102,88.102 ccw(c119.934,90.27) 123,90.27 123,90.5 123,90.73 ccw(c119.934,90.73) 122.102,92.898 120.398,94.602 cw(c122.566,96.77) 119.5,96.77 119.5,98 119.5,158 ccw(c115.5,158) 115.5,162 89.5,162 ccw(c89.5,158) 85.5,158 85.5,117 cw(c81.5,117) 81.5,113 65.5,113 ; -34.5,98 ccw(c-34.5,98) -34.5,98 ; -34.5,98 -34.5,109 ; -34.5,109 ccw(c-34.5,109) -34.5,109 ; -34.5,109 cw(c-30.5,109) -30.5,113 ; -30.5,113 ccw(c-30.5,113) -30.5,113 ; -30.5,113 7,113 ; 7,113 ccw(c7,113) 7,113 ; 7,113 7,113 ; 7,113 8.23,113 ccw(c8.23,116.066) 10.398,113.898 12.102,115.602 cw(c14.27,113.434) 14.27,116.5 14.5,116.5 14.73,116.5 cw(c14.73,113.434) 16.898,115.602 18.602,113.898 ccw(c20.77,116.066) 20.77,113 22,113 50.5,113 51.73,113 ccw(c51.73,116.066) 53.898,113.898 55.602,115.602 cw(c57.77,113.434) 57.77,116.5 58,116.5 58.23,116.5 cw(c58.23,113.434) 60.398,115.602 62.102,113.898 ccw(c64.27,116.066) 64.27,113 65.5,113 ; 65.5,113 ccw(c65.5,113) 65.5,113

## Text inside footprints (layer, text, board x,y; h text height)
CR1: Mechanical 13 "*" at -19.928,104.687 h1.27 r90
CR2: Mechanical 13 "*" at -7.228,104.687 h1.27 r90
J3: Mechanical 1 "BOARD EDGE" at -18.856,113.819 h0.5 r180
J10: Mechanical 1 "BOARD EDGE" at -6.106,113.819 h0.5 r180
U16_B1: Mechanical 13 "*" at 25.486,33.547 h1.27 r180
U16_B2: Mechanical 13 "*" at 47.486,33.547 h1.27 r180
U16_B3: Mechanical 13 "*" at 69.486,33.547 h1.27 r180
U16_B4: Mechanical 13 "*" at 91.486,33.547 h1.27 r180
U16_B5: Mechanical 13 "*" at 113.486,33.547 h1.27 r180